# Altium PCB PCB1.PcbDoc
Units mil, origin at the board's own origin, x right, y up, seen from the top; angles counter-clockwise.
Board outline 3665.01 x 3685.03 mil, 2 copper layers (Top Layer, Bottom Layer); 19 components, 17 nets, 59 pads, 0 vias.
Unrouted connection lines stored in the file: 23.
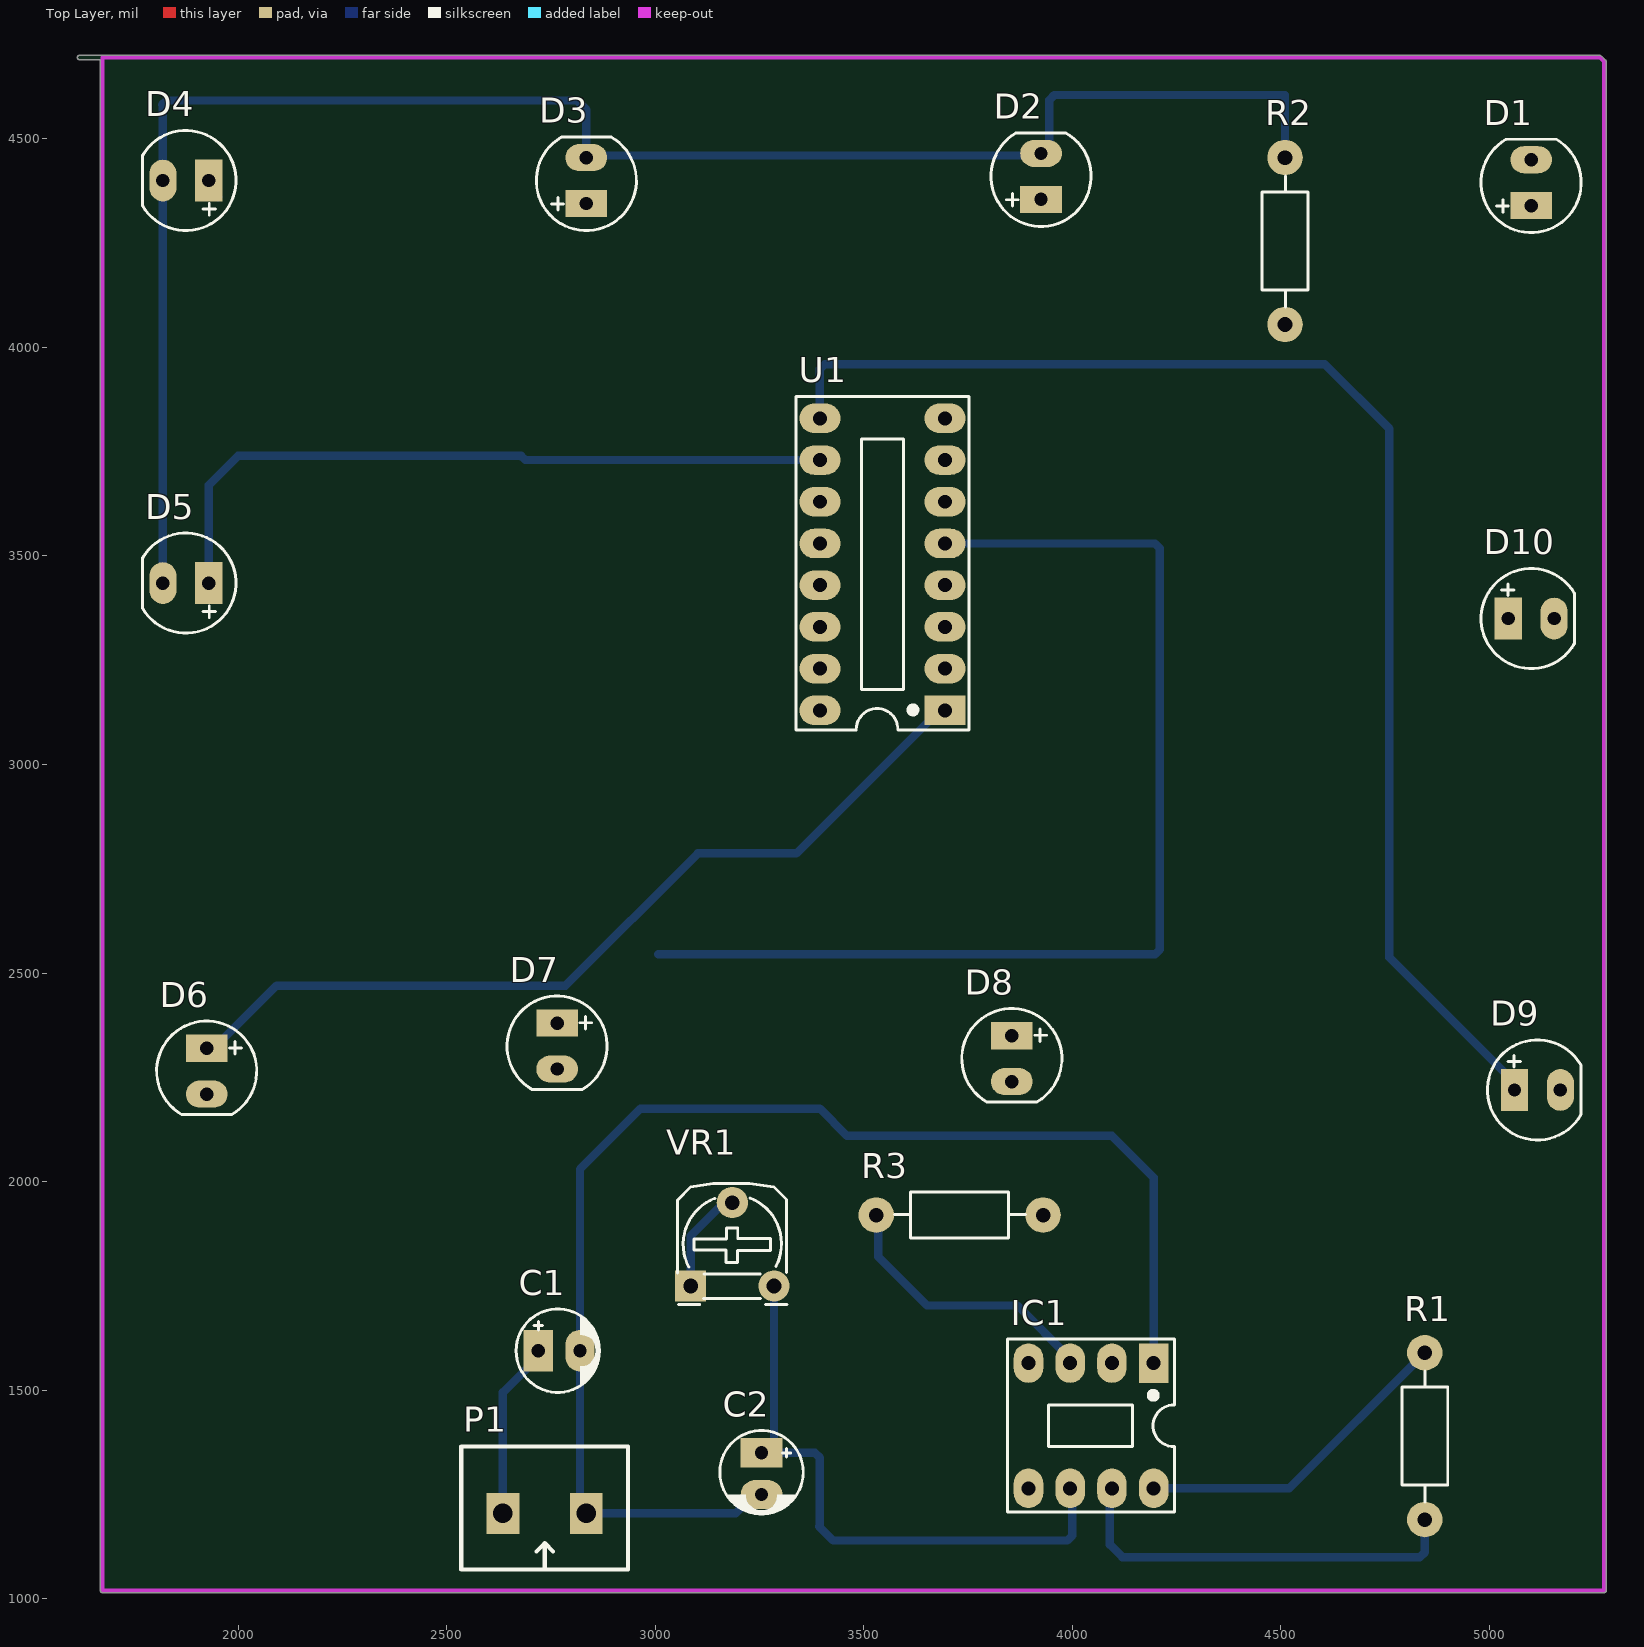
[diagram p0: Top Layer view]
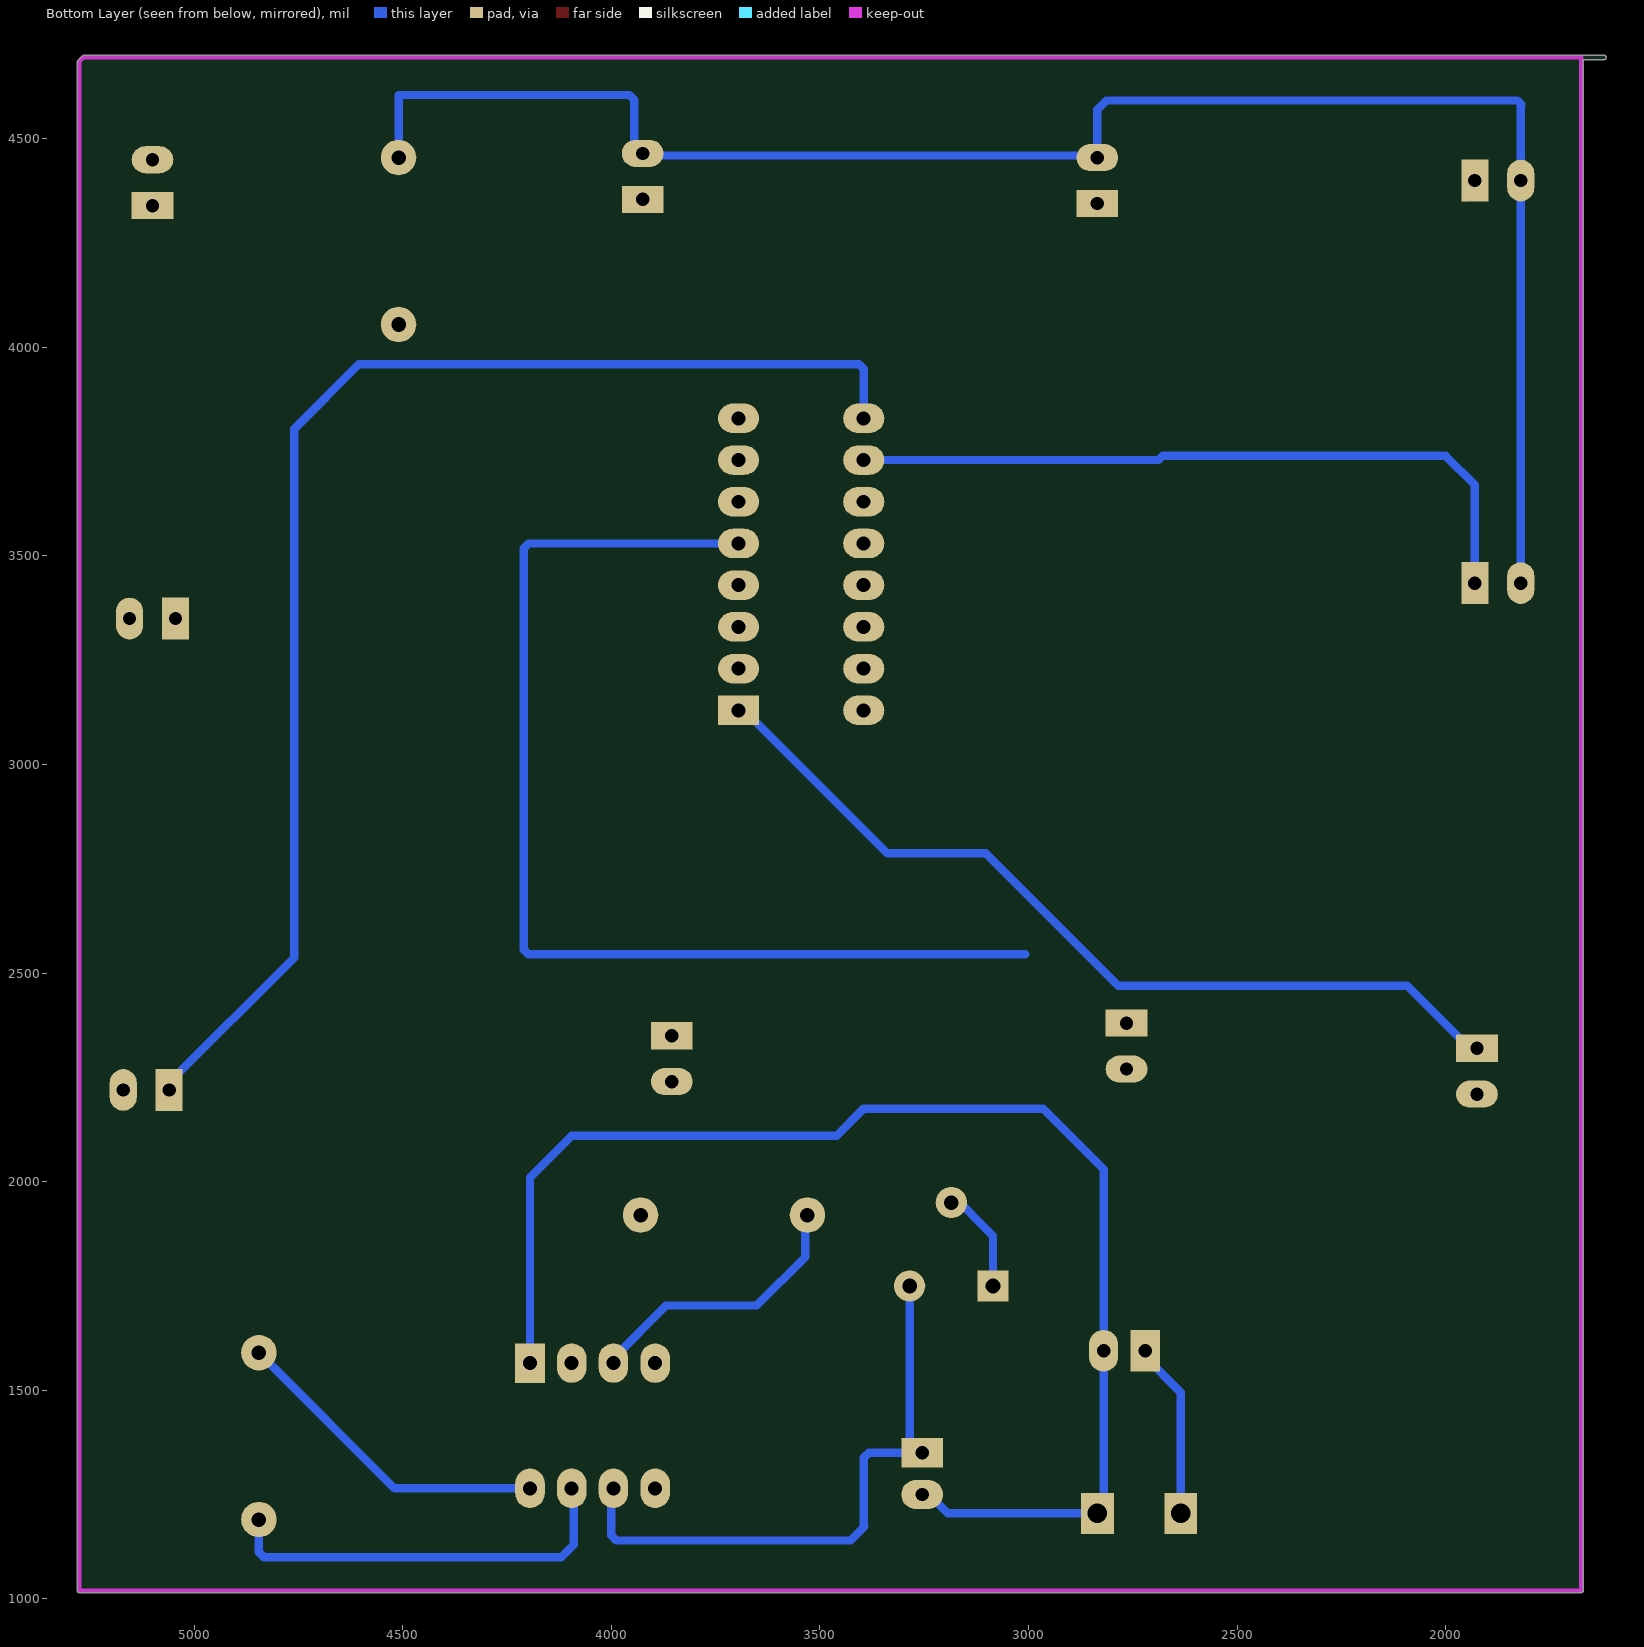
[diagram p1: Bottom Layer view, seen from below]

## Layer stack, top to bottom
Top Solder: solder mask 0.4, Solder Resist, Dk 3.5
Top Layer: signal copper 1.4
Dielectric 1: dielectric 12.6, FR-4, Dk 4.8
Bottom Layer: signal copper 1.4
Bottom Solder: solder mask 0.4, Solder Resist, Dk 3.5

## Board outline
1620,4689.98 1669.98,4689.98 1669.98,1020 ccw(c1675,1020) 1675,1014.99 5275,1014.99 ccw(c5275,1020) 5280.02,1020 5280.02,4685 5278.55,4688.55 5268.55,4698.55 5265,4700.02 1620,4700.02 ccw(c1620,4695)

## Design rules (kind name [scope] priority, off if disabled: settings)
Clearance [All] p1: gap=15 ignorepadtopadclearanceinfootprint=FALSE
PolygonConnect [All] p1: connectstyle=Relief reliefconductorwidth=10 reliefentries=4 polygonreliefangle="90 Angle" airgapwidth=10
RoutingVias [All] p1: holewidth=31.5 width=59.06 viastyle="Through Hole" minholewidth=31.5 minwidth=59.06 maxholewidth=31.5 maxwidth=59.06
SolderMaskExpansion [All] p1: expansion=4 istentingtop=FALSE
Width [All] p1: maxlimit=50 minlimit=20 preferedwidth=30
30 further rules are at their usual default settings.

## Classes and differential pairs
component class Sheet1: C1 C2 D1 D2 D3 D4 D5 D6 D7 D8 D9 D10 P1 R1 R2 R3 U1 VR1

## Components (designator, comment, footprint, x,y, rotation, side; value= is the part's Value field where it differs from the comment)
C1 "Cap Pol" CP1/2 2720,1595 r0 top value=1uF
C2 "Cap Pol" CP1/2 3255,1350 r270 top value=1uF
D1 "LED" LED-5mm 5100,4395 r90 top
D2 "LED" LED-5mm 3925,4410 r90 top
D3 "LED" LED-5mm 2835,4400 r90 top
D4 "LED" LED-5mm 1875,4400 r180 top
D5 "LED" LED-5mm 1875,3435 r180 top
D6 "LED" LED-5mm 1925,2265 r270 top
D7 "LED" LED-5mm 2765,2325 r270 top
D8 "LED" LED-5mm 3855,2295 r270 top
D9 "LED" LED-5mm 5115,2220 r0 top
D10 "LED" LED-5mm 5100,3350 r0 top
IC1 "LM555" DIP8/W0.3 4195,1565 r180 top
P1 "Domino 2" "DOMINO 2- 5mm" 2735,1205 r180 top
R1 "RESISTOR" "RES 1/2W" 4845,1190 r90 top value=10K
R2 "RESISTOR" "RES 1/2W" 4510,4055 r90 top value=330
R3 "RESISTOR" "RES 1/2W" 3930,1920 r180 top value=330
U1 "CD4017BE" DIP16/W0.3 3695,3130 r90 top
VR1 "10K" "Varistor 1" 3085,1750 r0 top value="VR 100K"

## Footprints (in the part's own frame and the unit in brackets; to place one, negate y for a bottom-side part, rotate by r counter-clockwise, add the part's x,y. Pads: shape width x height; smd on the part's side, far side on the other; paste and mask are expansions set on the pad)
CP1/2 [mil] "Tu hoa < 22uF/16>50V"
  rect 70x100 hole 32: 1(0,0)
  oval 70x100 hole 32: 2(100,0)
  silkscreen extent -53,-100 147,100, body extent -49,-99 149,99, height 287
DIP8/W0.3 [mm] "8 PIN, W 300mil, Pin to pin 100mil"
  rect 1.8x2.4 hole 0.85: 1(0,0)
  oval 1.8x2.4 hole 0.85: 2(2.54,0) 3(5.08,0) 4(7.62,0) 5(7.62,7.62) 6(5.08,7.62) 7(2.54,7.62) 8(0,7.62)
  silkscreen extent -1.28,-1.47 8.89,9.07, body extent -1.27,-1.02 8.89,8.54, height 5.11
DIP16/W0.3 [mm] "16 PIN, W 300mil, Pin to pin 100mil"
  rect 1.8x2.5 hole 0.85: 1(0,0)
  oval 1.8x2.5 hole 0.85: 2(2.54,0) 3(5.08,0) 4(7.62,0) 5(10.16,0) 6(12.7,0) 7(15.24,0) 8(17.78,0) 9(17.78,7.62) 10(15.24,7.62) 11(12.7,7.62) 12(10.16,7.62) 13(7.62,7.62) 14(5.08,7.62) 15(2.54,7.62) 16(0,7.62)
  silkscreen extent -1.2,-1.46 19.12,9.07, body extent -1.31,-1.46 19.09,9.04, height 7.61
"DOMINO 2- 5mm" [mm]
  rect 2x2.5 hole 1.2: 1(-2.54,0) 2(2.54,0)
  silkscreen extent -5.08,-4.08 5.08,3.43, body extent -5,-4.07 5,3.43, height 10
LED-5mm [mil] "LED 2 PIN, 5 ly , Only colour, pin to pin 110mil"
  rect 65x100 hole 32: 1(-55,0)
  oval 65x100 hole 32: 2(55,0)
  silkscreen extent -120,-120 104,120, body extent -113,-120 100,117, height 339
"RES 1/2W" [mil] "R 1/2W, 2 pin, 300mil"
  round 85 hole 35: 1(0,0) 2(400,0)
  silkscreen extent 42,-55 356,55, body extent -12,-45 414,49, height 91
"Varistor 1" [mil] "Resistor Variable"
  rect 75x75 hole 35: 1(0,0)
  round 75 hole 35: 2(100,200) 3(200,0)
  silkscreen extent -31,-44 231,246, body extent -68,-117 326,285, height 165

## Part data
C1 C2: "Polarized Capacitor (Radial)"
IC1: "Timer"
P1: "Domino, 2-Pin", LatestRevisionDate=17-Jul-2002, LatestRevisionNote="Re-released for DXP Platform.", Publisher="Altium Limited"
R1 R2 R3: "Resistor"
U1: library part CD4017, "IC 10-OUT DECADE COUNTER 16-DIP", Mfr="Texas Instruments", Operating Temperature="-55°C ~ 125°C", Package / Case="16-DIP (0.300\", 7.62mm)", Voltage - Supply="3 V ~ 18 V", Category="Integrated Circuits (ICs)", ComponentLink1Description=thegioiic, ComponentLink1URL=https://www.thegioiic.com/cd40174be-ic-flip-flop-d-type-positive-edge-16mhz-16-dip, Count Rate="5.5 MHz", Direction=Up, Logic Type="Counter, Decade", Mounting Type="Through Hole", Number of Bits per Element=10, Number of Elements=1, Reset=Asynchronous, Timing=Synchronous, Trigger Type="Positive Edge"
VR1: library part "Var Resistor", "Var Resistor"

## Nets (pads, with @x,y where several pads share a name; then routed paths per layer and width w, separated by ;. In a path a pad name is that pad's centre, name@x,y a point inside that pad or via, vN(x,y) a via of type N, cw(c..) or ccw(c..) an arc to the next point about the centre after c; other vN are vias at no path point)
GND: C1.2 C2.2 IC1.1 P1.1 R2.1 U1.8 U1.13 U1.15 | length 3218.3
  Bottom Layer w20: C2.2 3238.08,1250 3193.08,1205 P1.1 2820,1220 C1.2 2820,2030 2965,2175 3395,2175 3460,2110 4095,2110 4195,2010 IC1.1
LED1: D1.1 U1.3
LED2: D2.1 U1.2
LED3: D3.1 U1.4
LED4: D4.1 U1.7 | length 63.1
  Bottom Layer w20: D4.1 1930,4382.5 D4.1@1952.5,4360 ; U1.7 U1.7@3708.78,3730
LED5: D5.1 U1.10 | length 1733.1
  Bottom Layer w20: D5.1 1930,3670 2000,3740 2678.73,3740 2688.73,3730 U1.10
LED6: D6.1 U1.1 | length 2105.5
  Bottom Layer w20: D6.1 1942.5,2320 2092.5,2470 2785,2470 3102.28,2787.28 3338.5,2787.28 3681.22,3130 U1.1
LED7: D7.1 U1.5 | length 2706.3
  Bottom Layer w20: D7.1 D7.1@2782.5,2380 ; 3007.5,2545 4198.28,2545 4210,2556.72 4210,3518.28 4198.28,3530 U1.5
LED8: D8.1 U1.6
LED9: D9.1 U1.9 | length 3275.4
  Bottom Layer w20: U1.9@3381.22,3830 U1.9 3395,3948.28 3406.72,3960 4605,3960 4760,3805 4760,2537.5 5060,2237.5 D9.1
LED10: D10.1 U1.11
NetC2_1: C2.1 IC1.2 IC1.6 VR1.3 | length 1461.6
  Bottom Layer w20: C2.1 C2.1@3260,1350 ; VR1.3 3285,1375 C2.1@3260,1350 ; IC1.6 4000,1260 4000,1151.72 3988.28,1140 3426.57,1140 3393.28,1173.28 3395,1175 3395,1338.28 3383.28,1350 C2.1@3260,1350
NetD1_2: D1.2 D2.2 D3.2 D4.2 D5.2 D6.2 D7.2 D8.2 D9.2 D10.2 R2.2 | length 4242.8
  Bottom Layer w20: D5.2 D4.2 1820,4580 1818.28,4581.72 1828.28,4591.72 2813.28,4591.72 2835,4570 D3.2 2840,4460 3920,4460 D2.2 3945,4485 3945,4593.28 3956.72,4605 4510,4605 R2.2
NetIC1_3: IC1.3 R3.2 | length 674.6
  Bottom Layer w20: R3.2 3535,1915 3535,1820 3651.73,1703.27 3868.54,1703.27 3995,1576.81 IC1.3
NetIC1_7: IC1.7 R1.1 VR1.1 VR1.2 | length 1269.1
  Bottom Layer w20: VR1.1 3085,1870 3185,1970 VR1.2 ; IC1.7 4090,1260 4090,1130 4120,1100 4833.28,1100 4845,1111.72 R1.1
NetR3_1: R3.1 U1.14
VCC: C1.1 IC1.4 IC1.8 P1.2 R1.2 U1.16 | length 1209.8
  Bottom Layer w20: P1.2 2635,1495 2720,1580 C1.1 ; IC1.8 4520,1265 R1.2
pads on no net: IC1.5 U1.12

## Keep-outs
Keep-Out Layer:
  lines w10: 1675,4690 1675,1020 5275,1020 5275,4685 5265,4695 1675,4695